# Altium PCB 主板-霍尔BC接地.PcbDoc (part 2 of 6)
Units mm, origin at the board's own origin, x right, y up, seen from the top; angles counter-clockwise.
Board outline 97.69 x 103.45 mm, 2 copper layers (Top Layer, Bottom Layer); 83 components, 83 nets, 266 pads, 295 vias.
Unrouted connection lines stored in the file: 11.
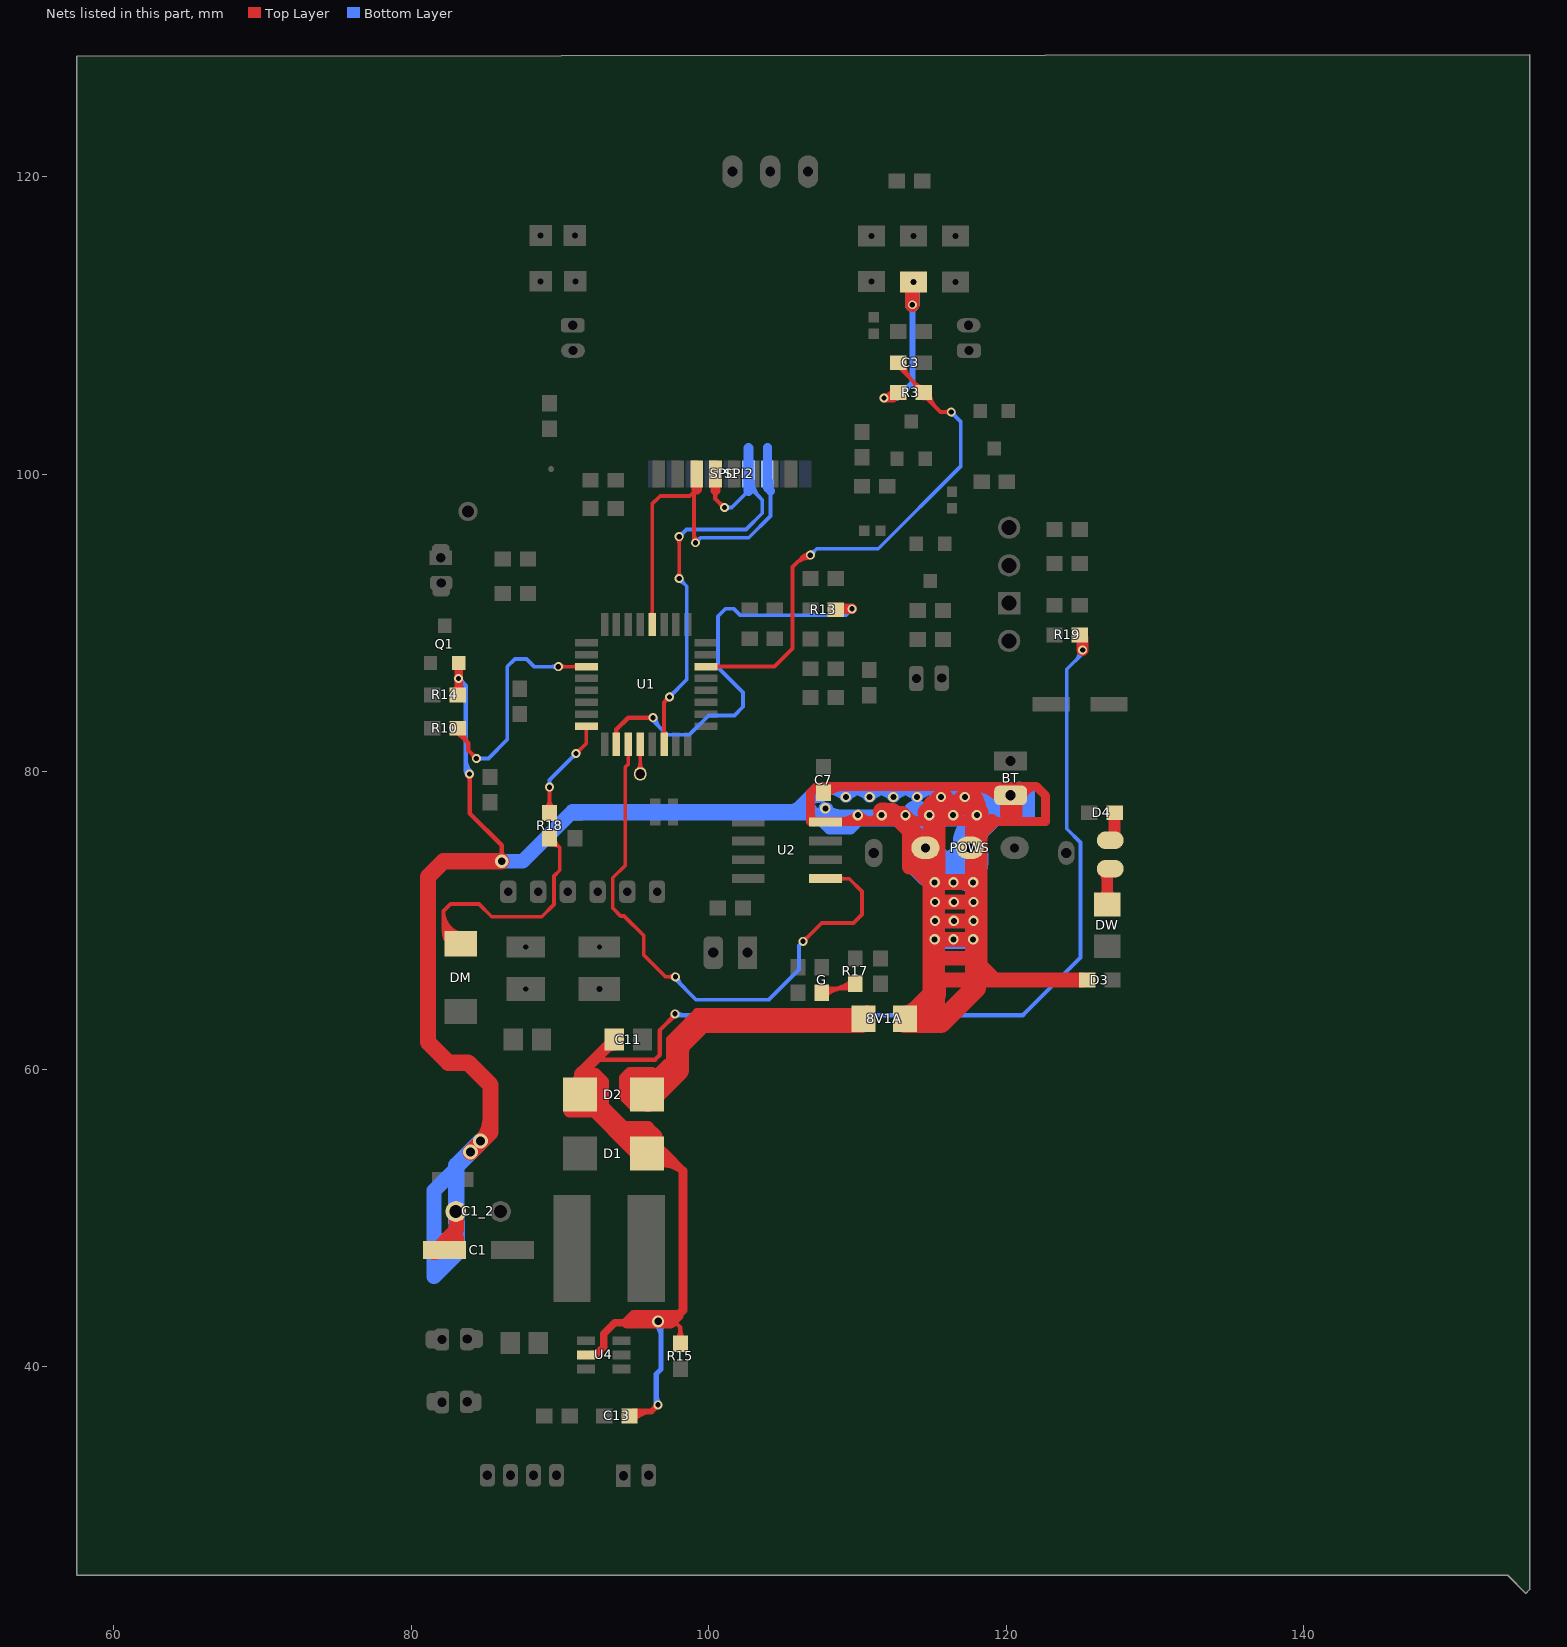
[diagram p2: the nets of this part, all layers, seen from the top]

## Via types
v1: diameter 0.6, hole 0.35, Top Layer to Bottom Layer, 117 vias
v2: diameter 0.7, hole 0.4, Top Layer to Bottom Layer, 104 vias
v3: diameter 0.8, hole 0.5, Top Layer to Bottom Layer, tented both sides, 32 vias
v4: diameter 0.8, hole 0.5, Top Layer to Bottom Layer, 15 vias
v5: diameter 1, hole 0.6, Top Layer to Bottom Layer, tented both sides, 5 vias
v6: diameter 1, hole 0.75, Top Layer to Bottom Layer, tented both sides, 5 vias
v7: diameter 3.4, hole 2.9, Top Layer to Bottom Layer, 4 vias
v8: diameter 0.65, hole 0.4, Top Layer to Bottom Layer, tented both sides, 2 vias
v9: diameter 0.8, hole 0.35, Top Layer to Bottom Layer, 2 vias
v10: diameter 0.7, hole 0.35, Top Layer to Bottom Layer, 2 vias
v11: diameter 1.1, hole 0.68, Top Layer to Bottom Layer, 2 vias
v12: diameter 0.62, hole 0.4, Top Layer to Bottom Layer, 1 vias
v13: diameter 0.95, hole 0.5, Top Layer to Bottom Layer, 1 vias
v14: diameter 0.9, hole 0.5, Top Layer to Bottom Layer, tented both sides, 1 vias
v15: diameter 0.7, hole 0.4, Top Layer to Bottom Layer, tented bottom, 1 vias
v16: diameter 0.8, hole 0.5, Top Layer to Bottom Layer, tented bottom, 1 vias

## Nets (pads, with @x,y where several pads share a name; then routed paths per layer and width w, separated by ;. In a path a pad name is that pad's centre, name@x,y a point inside that pad or via, vN(x,y) a via of type N, cw(c..) or ccw(c..) an arc to the next point about the centre after c; other vN are vias at no path point) (continued)
BT: 8V1A.1 8V1A.2 BT.1 C1.2 C1_2.2 C7.2 D2.2 D3.1 POWS.2 POWS.3 Q1.2 R14.1 U2.4 | length 538.8
  Top Layer w0.3: v1@83.816,79.752 cw(c83.559,79.495) 83.922,79.495 cw(c84.284,79.495) v1@84.028,79.752 ; v1(83.922,79.858) 83.922,77.216 86.081,75.057 v14(86.081,73.99) ; v14@85.868,74.202 ccw(c85.356,74.714) 86.081,74.714 ccw(c86.805,74.714) v14@86.293,74.202
  Top Layer w0.5: 97.384,60.071 97.384,62.027 97.536,62.179 ; 97.587,59.233 97.587,59.782 ; 97.866,61.29 97.796,61.525 97.536,61.785 97.536,62.179 ; 98.273,61.849 98.273,62.916 ; 98.641,63.284 98.958,63.602 ; 100.416,63.144 100.873,63.602 98.958,63.602 ; 108.21,63.856 cw(c108.21,61.308) 8V1A.2@110.011,63.109 ; 109.417,63.856 cw(c109.417,62.515) 8V1A.2@110.365,63.463 ; 8V1A.2@110.668,64.072 110.452,63.856 99.212,63.856 98.958,63.602 ; 8V1A.1@113.656,63.806 cw(c113.979,64.024) 113.703,64.3 114.554,65.151 ; 8V1A.1@113.75,63.498 cw(c115.799,63.498) 114.35,64.947 ; 114.605,63.602 115.138,64.135 ; 97.536,62.179 98.273,62.916 ; 98.273,62.916 98.958,63.602 ; 8V1A.1@113.2,64.048 ccw(c113.2,64.655) 113.629,64.226 cw(c113.2,64.655) 8V1A.1@113.2,64.048
  Top Layer w0.6: R14.1@83.029,85.311 ccw(c82.628,85.712) 83.195,85.712 ; R14.1@83.195,84.988 Q1.2@83.195,87.32 ; 106.858,77.101 ccw(c107.528,77.101) U2.4@107.054,76.627 ; C7.2@107.864,78.509 cw(c109.098,77.275) 109.098,79.019 ; U2.4@108.869,76.657 ccw(c108.869,78.252) v2@109.997,77.124 ; v2@110.068,77.124 ccw(c111.196,78.252) 111.196,76.657 ; 110.469,76.657 ccw(c110.469,78.252) v2@111.597,77.124 ; v2@111.668,77.124 ccw(c112.796,78.252) 112.796,76.657 ; 112.069,76.657 ccw(c112.069,78.252) v2@113.197,77.124 ; v2@113.268,77.124 ccw(c114.396,78.252) 114.396,76.657 ; 113.669,76.657 ccw(c113.669,78.252) v2@114.797,77.124 ; v2@114.868,77.124 ccw(c115.996,78.252) 115.996,76.657 ; 115.269,76.657 ccw(c115.269,78.252) v2@116.397,77.124 ; v2@116.468,77.124 ccw(c117.596,78.252) 117.596,76.657 ; 116.869,76.657 ccw(c116.869,78.252) v2@117.997,77.124 ; 117.563,79.019 cw(c117.563,76.135) BT.1@119.602,78.175 ; v2@118.072,77.12 ccw(c119.024,77.869) 119.024,76.657 ; 119.011,79.019 cw(c119.011,77.583) BT.1@120.027,78.599 ; BT.1@119.361,78.837 cw(c119.606,78.764) BT.1@119.606,79.019 ; BT.1@119.936,78.665 cw(c120.411,78.523) BT.1@120.411,79.019 ; BT.1@120.51,78.494 cw(c121.216,78.283) BT.1@121.216,79.019 ; BT.1@121.085,78.322 cw(c122.022,78.042) 122.022,79.019 ; 119.024,76.657 122.657,76.657 122.657,78.384 122.022,79.019 ; 119.024,76.657 115.164,76.657 113.005,76.657 106.858,76.657 106.858,78.588 107.29,79.019 122.022,79.019
  Top Layer w0.8: D2.2@94.945,57.607 94.361,58.191 94.361,59.411 94.717,59.766 96.19,59.766
  Top Layer w1: C1.2@81.509,47.676 C1.2@81.61,47.676 ; C1.2@83.05,47.854 83.05,48.663 C1.2@82.232,47.845 81.678,47.845 83.05,49.217 C1_2.2@83.05,50.442 ; 113.487,73.59 cw(c114.55,73.59) POWS.3@114.408,74.644 ; 113.487,74.735 cw(c114.395,74.735) 114.273,75.635 ; 113.487,75.046 ccw(c114.393,75.046) 114.284,74.147 ; POWS.3@114.404,75.14 cw(c114.529,76.175) 113.487,76.175 113.487,73.939 v2@115.138,72.288 ; v2@114.859,72.517 115.672,72.517 ; v2@114.884,69.926 115.697,69.926 ; v2@114.884,71.196 115.697,71.196 ; v2@115.164,72.644 117.373,72.644 ; 115.282,66.158 115.44,66 124.395,66 ; 115.672,67.462 117.881,67.462 ; 115.672,68.732 v2(116.459,68.732) v2(117.78,68.732) v2@117.881,68.732 ; 115.672,72.568 v2(116.459,72.568) v2(117.78,72.568) v2@117.881,72.568 ; 115.697,69.977 v2(116.484,69.977) v2(117.805,69.977) v2@117.907,69.977 ; 115.697,71.247 v2(116.484,71.247) v2(117.805,71.247) v2@117.907,71.247 ; 117.373,72.593 v2@117.615,72.834 ; POWS.2@117.597,74.715 cw(c115.991,73.109) 118.262,73.109 ; v2@117.63,72.568 cw(c118.31,72.568) 117.829,73.049 ; POWS.2@117.7,75.131 ccw(c117.462,75.895) 118.262,75.895 ; v2@117.856,72.439 ccw(c117.433,73.152) 118.262,73.152 ; v2@117.886,68.626 ccw(c117.038,69.474) 118.237,69.474 ; v2@117.886,68.838 cw(c117.038,67.991) 118.237,67.991 ; v2@117.886,72.674 cw(c117.038,71.826) 118.237,71.826 ; v2@117.911,69.871 ccw(c117.125,70.657) 118.237,70.657 ; v2@117.911,70.083 cw(c117.125,69.297) 118.237,69.297 ; v2@117.911,71.141 ccw(c117.125,71.927) 118.237,71.927 ; v2@117.911,71.353 cw(c117.125,70.567) 118.237,70.567 ; POWS.2@118.015,74.958 cw(c118.943,75.214) 118.262,75.895 ; POWS.2@118.024,74.892 cw(c119.871,74.892) 118.565,76.198 ; 118.237,73.309 cw(c117.038,73.309) 117.886,72.462 ccw(c116.977,73.371) 118.262,73.371 ; 119.024,76.657 118.262,75.895 ; D3.1@125.15,66 124.395,66 ; v2@117.615,72.834 118.237,73.457 118.237,73.127 ; v2@117.615,72.834 117.945,72.834 118.237,73.127 ; 118.237,73.127 cw(c117.425,73.127) 117.86,72.441 ccw(c117.425,73.127) 118.237,73.127 ; 118.237,73.127 118.237,66.98 119.217,66 124.395,66 ; 118.237,73.127 118.262,73.152 ; 118.262,73.152 118.262,75.895
  Top Layer w1.1: v5(83.998,54.432) 85.327,55.761 85.327,58.945 83.82,60.452 82.499,60.452 81.128,61.824 81.128,72.949 82.169,73.99 v14@86.055,73.99 ; v5@84.694,55.133 ccw(c83.165,56.662) 85.327,56.662
  Top Layer w1.2: v2@111.633,77.339 cw(c111.633,75.673) 112.811,76.851 ; 112.166,77.292 112.37,77.292 113.005,76.657 POWS.3@114.174,75.488 ; 112.533,77.129 ccw(c113.233,77.828) v2@113.233,76.839 ; v2@112.983,77.089 ccw(c113.972,77.089) 113.272,76.389 ; 113.838,75.824 cw(c112.906,74.892) POWS.3@114.224,74.892 ; v2@114.656,77.266 cw(c115.762,76.16) 115.762,77.724 ; v2@115.444,78.131 ccw(c116.428,79.115) 116.428,77.724 ; 115.503,77.724 cw(c115.503,76.16) v2@116.609,77.266 ; v2@115.859,78.232 cw(c115.164,78.454) 115.164,77.724 117.932,77.724 cw(c117.932,78.898) v2@117.029,78.149 ; v2@116.256,77.266 cw(c117.362,76.16) 117.362,77.724 ; 116.414,77.724 ccw(c116.414,79.115) v2@117.398,78.131 ; 117.103,77.724 cw(c117.103,76.16) v2@118.209,77.266
  Top Layer w1.4: D2.2@95.85,58.166 D2.2@95.91,58.166 ; D2.2@95.85,58.75 ccw(c95.85,61.041) 97.47,59.421 ; D2.2@95.91,57.836 D2.2@95.91,58.166 ; D2.2@96.3,58.3 cw(c97.96,58.3) 96.786,59.474 ; 97.384,60.071 95.91,58.598 D2.2@95.91,58.166 ; 97.866,61.29 98.044,61.468 ; 97.993,61.087 97.993,59.944 96.063,58.014 D2.2@95.91,58.166 ; 98.273,61.849 99.568,63.144 100.416,63.144 8V1A.2@110.312,63.144 ; 8V1A.1@113.2,63.598 ccw(c113.2,64.652) 8V1A.1@113.945,63.907 ; 114.097,64.059 113.182,63.144 115.621,63.144 117.932,65.456 117.932,77.724 ; 115.24,65.024 115.24,65.634 ; v2@117.468,78.556 cw(c116.349,77.436) 117.932,77.436 ccw(c116.349,77.436) v2@117.468,78.556
  Top Layer w1.5: 115.138,64.135 v2@115.138,72.288 ; v2@115.164,72.593 115.164,72.644 115.164,76.657 115.164,77.724 ; 115.164,73.951 ccw(c113.833,73.951) 114.774,74.892 ccw(c113.833,75.832) 115.164,75.832 ; 120.345,77.216 120.345,77.572
  Bottom Layer w0.3: v1@83.185,86.134 cw(c83.185,85.772) 83.441,86.028 cw(c83.697,86.284) v1@83.335,86.284 ; v1(83.185,86.284) 83.668,85.801 83.668,80.112 v1(83.922,79.858) ; 83.668,80.109 ccw(c84.173,80.109) v1@83.816,79.752 ; 83.668,80.833 ccw(c84.897,80.833) v1@84.028,79.964
  Bottom Layer w0.8: 105.693,77.27 105.896,77.473 107.34,78.918 117.132,78.918 ; 106.161,77.739 cw(c107.595,76.305) 107.595,78.333 ; 106.829,77.473 108.128,76.175 109.525,76.175 110.058,76.708 ; v2@107.799,77.555 ccw(c108.693,77.4) 108.052,76.759 ; v2@107.813,77.511 ccw(c108.857,78.554) 108.857,77.079 ; 107.87,78.918 cw(c107.87,76.957) v2@109.256,78.344 ; v2@109.186,78.344 cw(c110.572,76.957) 110.572,78.918 ; 109.233,76.708 ccw(c109.233,77.888) v2@110.068,77.054 ; 109.47,78.918 cw(c109.47,76.957) v2@110.856,78.344 ; 109.83,76.48 ccw(c109.222,77.089) v2@110.083,77.089 ; v2@109.997,77.054 ccw(c110.832,77.888) 110.832,76.708 ; v2@110.338,76.987 110.058,76.708 ; v2@110.786,78.344 cw(c112.172,76.957) 112.172,78.918 ; 110.833,76.708 ccw(c110.833,77.888) v2@111.668,77.054 ; 111.07,78.918 cw(c111.07,76.957) v2@112.456,78.344 ; v2@111.597,77.054 ccw(c112.432,77.888) 112.432,76.708 ; v2@112.386,78.344 cw(c113.772,76.957) 113.772,78.918 ; 112.433,76.708 ccw(c112.433,77.888) v2@113.268,77.054 ; 112.67,78.918 cw(c112.67,76.957) v2@114.056,78.344 ; v2@113.196,77.055 ccw(c113.995,77.802) 113.995,76.708 ; v2@113.986,78.344 cw(c115.372,76.957) 115.372,78.918 ; 114.033,76.708 ccw(c114.033,77.888) v2@114.868,77.054 ; 114.27,78.918 cw(c114.27,76.957) v2@115.656,78.344 ; v2@114.797,77.054 ccw(c115.632,77.888) 115.632,76.708 ; v2@115.586,78.344 cw(c116.972,76.957) 116.972,78.918 ; 115.633,76.708 ccw(c115.633,77.888) v2@116.468,77.054 ; 115.87,78.918 cw(c115.87,76.957) v2@117.256,78.344 ; v2@116.397,77.054 ccw(c117.232,77.888) 117.232,76.708 ; v2@117.186,78.344 cw(c118.572,76.957) 118.572,78.918 ; v2@117.221,78.358 cw(c117.221,77.222) 118.025,78.025 ; 117.233,76.708 ccw(c117.233,77.888) v2@118.068,77.054 ; v2@117.268,78.291 ccw(c116.713,78.499) 117.132,78.918 ; 117.461,78.589 cw(c115.962,77.089) v2@118.083,77.089 ; v2@117.983,77.082 ccw(c118.415,77.144) 118.415,76.708 ; v2@117.986,77.072 ccw(c118.436,77.233) 118.436,76.755 ; v2@117.997,77.054 ccw(c118.719,77.775) 118.719,76.755 ; 118.049,78.918 cw(c118.049,76.621) BT.1@119.673,78.245 ; v2@118.056,77.045 ccw(c117.75,77.635) 118.415,77.635 ; v2@118.055,77.134 cw(c117.76,76.549) 118.415,76.549 ; v2@118.057,77.133 cw(c117.742,76.567) 118.389,76.567 ; v2@118.058,77.132 cw(c117.709,76.548) 118.389,76.548 ; 118.389,76.683 118.389,76.708 ; BT.1@120.683,78.181 cw(c120.369,77.041) 121.552,77.041 ; BT.1@120.896,78.952 cw(c120.659,78.091) 121.552,78.091 ; BT.1@120.999,78.404 cw(c121.552,78.364) 121.552,78.918 ; 121.219,77.079 120.828,77.079 119.771,77.079 118.785,77.079 118.415,77.079 ; 108.052,76.759 107.732,77.079 113.995,77.079 118.389,77.079 118.415,77.079 ; 108.052,76.759 108.102,76.708 110.058,76.708 ; 110.058,76.708 113.995,76.708 ; 113.995,76.708 118.389,76.708 ; 117.132,78.918 118.415,77.635 ; 117.132,78.918 121.552,78.918 ; 118.389,76.708 cw(c118.389,77.116) 117.983,77.085 ccw(c118.389,77.116) 118.389,76.708 ; 118.389,76.708 118.415,76.708 ; 118.389,76.708 118.415,76.733 ; 118.415,76.708 118.415,76.733 ; 118.415,76.733 118.415,77.079 ; 118.415,76.733 118.436,76.755 ; 118.415,77.079 118.415,77.635 ; 118.436,76.755 118.462,76.755 ; 118.462,76.755 cw(c118.462,77.271) 117.987,77.07 ccw(c118.462,77.271) 118.462,76.755 ; 118.462,76.755 120.735,76.755 120.752,76.771 121.026,76.771 121.552,77.297 121.552,78.918 ; v2@118.04,77.139 cw(c117.979,76.707) 118.415,76.707 ccw(c117.979,76.707) v2@118.04,77.139 ; v2@118.054,77.134 cw(c117.789,76.567) 118.415,76.567 ccw(c117.789,76.567) v2@118.054,77.134
  Bottom Layer w0.9: 90.703,77.191 107.112,77.191 ; 94.209,77.343 94.267,77.401 105.824,77.401 105.896,77.473 106.829,77.473 ; 107.544,76.759 108.052,76.759 108.636,76.759 ; 107.732,77.079 107.224,77.079 ccw(c107.224,77.893) v2@107.936,77.498
  Bottom Layer w1: 82.017,47.93 82.017,47.549 83.033,47.549 ; 82.067,48.484 ccw(c82.871,48.484) 82.303,47.916 ; 82.855,53.162 81.534,51.841 81.534,46.05 83.05,47.566 83.05,48.336 ; v14(86.081,73.99) 87.503,73.99 90.703,77.191 ; 90.856,77.343 94.209,77.343 ; POWS.3@114.173,74.443 ccw(c115.684,75.571) 115.684,73.685 ; v2@114.935,68.758 114.935,73.152 ; v2@114.935,68.961 115.318,68.578 118.212,68.578 118.212,76.505 ; 114.935,68.983 ccw(c115.44,68.983) v2@115.083,68.626 ; 114.935,69.665 cw(c115.527,69.665) v2@115.108,70.083 ; 114.935,70.289 ccw(c115.527,70.289) v2@115.108,69.871 ; 114.935,70.935 cw(c115.527,70.935) v2@115.108,71.353 ; 114.935,71.559 ccw(c115.527,71.559) v2@115.108,71.141 ; 114.935,72.317 cw(c115.44,72.317) 115.083,72.674 cw(c115.869,71.887) 115.869,73 ; 114.935,72.819 ccw(c115.44,72.819) v2@115.083,72.462 ; 114.935,73 117.348,73 cw(c117.348,72.378) v2@117.917,72.628 ; POWS.3@114.974,75.041 ccw(c117.678,77.059) 117.678,73.685 114.376,73.685 ccw(c114.376,77.249) POWS.2@117.177,75.046 ; 115.779,73 cw(c115.779,71.887) v2@116.565,72.674 ; v2@116.353,72.674 cw(c117.139,71.887) 117.139,73 ; 116.435,73.685 ccw(c116.435,75.63) POWS.2@117.964,74.428 ; 117.099,73 cw(c117.099,71.887) 117.886,72.674 cw(c117.099,71.887) 118.212,71.887 ; POWS.2@117.597,74.715 cw(c116.114,73.232) 118.212,73.232 ; POWS.2@117.601,75.072 ccw(c116.226,76.505) 118.212,76.505 ; v2@117.886,68.626 ccw(c117.099,69.413) 118.212,69.413 ; v2@117.886,72.462 ccw(c117.099,73.248) 118.212,73.248 ; v2@117.911,69.871 ccw(c117.186,70.596) 118.212,70.596 ; v2@117.911,70.083 cw(c117.186,69.358) 118.212,69.358 ; v2@117.911,71.141 ccw(c117.186,71.866) 118.212,71.866 ; v2@117.911,71.353 cw(c117.186,70.628) 118.212,70.628 ; v2@118.139,77.195 cw(c117.533,76.59) 118.389,76.59 ; 118.389,76.683 118.212,76.505 ; 118.389,76.708 118.389,77.079 118.389,77.14 ; v2@118.107,77.219 cw(c117.828,76.732) 118.389,76.732 ccw(c117.828,76.732) v2@118.107,77.219
  Bottom Layer w1.1: 83.033,49.727 83.033,53.467 ; 83.05,47.898 83.05,49.727 ; v5@84.506,54.94 83.033,53.467 ; v5(84.658,55.169) 83.033,53.543 83.033,53.467
  Bottom Layer w1.3: 118.608,78.537 118.461,78.389 ; 119.771,77.079 119.278,77.572 118.461,78.389 ; BT.1@119.85,78.422 ccw(c119.172,77.678) 118.461,78.389 ; 120.828,77.079 120.828,77.47
  Bottom Layer w2: 113.995,77.114 113.995,77.079 113.995,76.708 113.995,74.092 114.935,73.152 cw(c116.155,74.372) POWS.3@114.54,74.98 ; POWS.2@117.524,74.892 cw(c119.758,74.892) 118.178,76.472 ; POWS.2@117.556,74.77 cw(c118.47,75.282) 117.729,76.022 ; POWS.2@117.587,75.023 cw(c116.185,74.163) 117.348,73 117.729,73.381 117.729,76.022 ; 118.212,76.505 117.729,76.022 ; 118.389,76.683 118.415,76.708 118.462,76.755 118.785,77.079 119.278,77.572 BT.1@119.99,78.283
  other v2: 115.189,68.732 115.214,69.977 115.214,71.247 115.189,72.568 110.033,77.089 111.633,77.089 113.233,77.089 114.833,77.089 116.433,77.089 118.033,77.089 107.848,77.546 109.221,78.308 110.821,78.308 112.421,78.308 114.021,78.308 115.621,78.308 117.221,78.308
BTJC: 
C-84: C11.1 C13.1 D1.2 D2.1 R15.1 R19.1 U4.5 | length 143.4
  Top Layer w0.3: D2.1@91.35,58.887 91.599,59.136 91.77,58.965 91.77,59.688 ; D2.1@92.053,59.011 cw(c92.721,59.688) 91.77,59.688 ; v4@96.773,42.876 cw(c97.506,42.143) 97.506,43.18 ; v4@96.835,42.981 cw(c97.104,42.899) 97.104,43.18 97.561,43.18 ; 97.429,63.342 ccw(c97.043,63.729) v1@97.589,63.729 ; v1@97.79,63.703 96.723,62.636 96.723,60.985 96.393,60.655 92.317,60.655 92.202,60.655 91.77,60.223 91.77,60.108 91.77,59.688 ; R15.1@97.853,41.848 ccw(c97.255,42.445) 98.1,42.445 ccw(c98.945,42.445) R15.1@98.348,41.848 ; R15.1@98.1,41.55 98.1,42.641 97.561,43.18 ; 97.134,42.887 cw(c97.561,42.722) 97.561,43.18 ; 97.134,42.887 cw(c97.561,42.722) 97.561,43.18 ; 97.134,42.887 cw(c97.561,42.722) 97.561,43.18
  Top Layer w0.4: C13.1@94.658,36.77 cw(c95.205,36.235) C13.1@95.205,37 ; C13.1@94.68,36.8 94.88,37 96.157,37 ; C13.1@94.944,36.49 cw(c96.157,35.304) 96.157,37 ; v1(96.596,37.44) 96.157,37
  Top Layer w0.5: D2.1@91.35,58.166 D2.1@91.77,58.166 ; U4.5@91.75,40.8 92.413,40.8 92.939,41.326 92.939,42.215 93.685,42.961 94.513,42.961 ; U4.5@92.055,40.845 ccw(c92.055,41.818) 92.743,41.13
  Top Layer w0.6: D1.2@95.656,54.28 97.155,54.28 ; D1.2@95.709,54.65 cw(c96.189,53.559) 97.032,54.402 ; D1.2@95.951,54.101 cw(c96.569,52.698) 97.652,53.782 ; D1.2@96.193,53.552 cw(c96.948,51.837) 98.273,53.162 ; D1.2@96.607,53.944 cw(c97.155,53.665) 97.155,54.28 ; D1.2@96.645,54.632 ccw(c97.155,54.826) 97.155,54.28 ; 97.428,42.961 98.273,43.805 98.273,53.162 ; 97.155,54.28 98.273,53.162
  Top Layer w0.8: D2.1@90.653,57.175 92.685,57.175 ; D2.1@90.939,58.927 ccw(c90.441,59.688) 91.35,59.688 ; D2.1@91.35,58.166 91.35,58.887 91.35,59.688 ; D2.1@91.761,58.927 cw(c92.259,59.688) 91.35,59.688 ; 92.888,57.15 92.888,59.182 92.382,59.688 91.77,59.688 91.35,59.688 ; C11.1@93.073,61.411 cw(c93.65,60.834) C11.1@93.65,61.65 ; C11.1@93.462,62 C11.1@93.662,62 ; C11.1@93.75,62 C11.1@93.662,62 ; 93.955,56.109 95.91,56.109 96.495,55.524 95.275,55.524 ; 95.688,43.429 cw(c95.688,42.145) v4(96.596,43.053) cw(c97.504,42.145) 97.504,43.429 ; v4@96.749,43.155 96.749,43.129 96.901,42.977 97.444,42.977 97.896,43.429 94.982,43.429 94.513,42.961 97.428,42.961 ; R19.1@124.929,89.129 cw(c124.407,88.607) 125.146,88.607 ; v1(125.146,88.189) R19.1@125.146,89 ; 91.35,59.688 91.77,60.108 92.317,60.655 C11.1@93.662,62
  Top Layer w1.5: D2.1@91.35,57.9 cw(c91.35,56.243) 92.521,57.415 ; D2.1@91.77,58.166 D1.2@95.656,54.28 ; D1.2@94.751,55.186 ccw(c95.85,56.285) D1.2@95.85,54.73
  Bottom Layer w0.254: 121.202,63.721 124.993,67.513 124.993,75.257 124.079,76.171 124.079,86.893 v1@125.146,87.96 ; 124.689,87.503 ccw(c124.003,88.189) v1@124.973,88.189
  Bottom Layer w0.3: v1@97.79,63.721 97.882,63.629 121.11,63.629 121.202,63.721 ; v1@97.845,63.835 ccw(c98.341,64.33) 98.341,63.629
  Bottom Layer w0.35: v4@96.437,42.894 cw(c95.562,42.019) 96.799,42.019 ; 96.469,38.048 ccw(c97.205,38.048) v1@96.685,37.528 ; v1@96.622,37.49 96.469,37.643 96.469,39.497 96.799,39.827 96.799,42.85 v4@96.634,43.015
  other v1: 97.739,63.729
CE: SPI1.6 SPI2.6 U1.12 | length 28.7
  Top Layer w0.254: U1.12@96.113,90.514 ccw(c95.903,90.724) 96.2,90.724 ccw(c96.497,90.724) U1.12@96.287,90.514 ; U1.12@96.2,89.902 96.2,98.003 96.749,98.552 98.73,98.552 99.009,98.831 99.009,95.631 v1@99.238,95.402 ; 99.009,96.065 ccw(c99.774,96.065) v1@99.233,95.525
  Top Layer w0.7: 99.187,99.009 SPI1.6@99.187,100.032
  Bottom Layer w0.254: v1(99.111,95.402) 99.441,95.733 102.692,95.733 104.165,97.206 104.165,98.882 ; v1@99.111,95.575 ccw(c99.111,95.993) 99.406,95.698 ccw(c99.701,95.402) v1@99.284,95.402
  Bottom Layer w0.6: 103.95,101.803 103.95,99.098 104.165,98.882 cw(c104.547,99.264) SPI2.6@104.062,99.502
CKTS: pad.0@95.402,79.858 U1.28 | length 3.4
  Top Layer w0.254: pad.0@95.188,80.092 ccw(c94.677,80.603) 95.4,80.603 ; U1.28@95.313,81.241 cw(c95.103,81.031) 95.4,81.031 cw(c95.697,81.031) U1.28@95.487,81.241 ; pad.0@95.4,79.855 U1.28@95.4,81.599 ; 95.4,80.615 ccw(c96.14,80.615) pad.0@95.617,80.092
CMD2: 
CSN: SPI1.5 SPI2.5 U1.30 | length 38.4
  Top Layer w0.254: U1.30@96.913,82.464 ccw(c96.703,82.674) 97,82.674 ccw(c97.297,82.674) U1.30@97.087,82.464 ; U1.30@97,81.853 97,84.681 v1(97.358,85.039) ; v1@97.185,85.039 cw(c96.768,85.039) 97.063,84.744 cw(c97.358,84.449) v1@97.358,84.866 ; v1@97.896,93.112 ccw(c97.601,93.407) 98.019,93.407 ccw(c98.436,93.407) v1@98.141,93.112 ; v1@97.896,95.686 cw(c97.601,95.391) 98.019,95.391 cw(c98.436,95.391) v1@98.141,95.686 ; v1@98.019,92.939 v1(98.019,95.809)
  Top Layer w0.3: 100.457,98.933 100.457,98.349 v1@101.054,97.752 ; 100.767,98.039 ccw(c101.067,98.338) v1@101.067,97.915 ; 100.828,97.977 cw(c100.616,97.765) v1@100.917,97.765
  Top Layer w0.7: 100.457,98.933 SPI1.5@100.457,100.032
  Bottom Layer w0.254: v1(97.358,85.039) 98.527,86.208 98.527,92.481 v1(98.019,92.989) ; v1@97.358,85.212 ccw(c97.358,85.63) 97.654,85.335 ccw(c97.949,85.039) v1@97.531,85.039 ; v1@98.019,92.816 cw(c98.019,92.399) 98.314,92.694 cw(c98.609,92.989) v1@98.192,92.989 ; v1(98.019,95.809) 98.501,96.291 102.514,96.291 103.607,97.384 103.607,98.274 SPI2.5@102.68,99.2 ; v1@98.019,95.982 ccw(c98.019,96.399) 98.314,96.104 ccw(c98.609,95.809) v1@98.192,95.809 ; v1(101.067,97.765) 101.549,97.765 102.68,98.895 ; v1@101.189,97.642 cw(c101.484,97.347) 101.484,97.765 cw(c101.484,98.182) v1@101.189,97.887 ; SPI2.5@102.724,99.557 ccw(c103.691,99.557) 103.007,98.873 ; SPI2.5@102.978,99.557 ccw(c104.558,99.557) 103.441,98.439
  Bottom Layer w0.7: 102.68,98.895 102.68,101.752
DCJC: R13.2 U1.26 | length 31
  Top Layer w0.3: U1.26@93.8,81.853 93.8,82.853 94.59,83.642 v1(96.266,83.642) ; v1@96.16,83.536 ccw(c95.904,83.28) 95.904,83.642 ccw(c95.904,84.004) v1@96.16,83.748 ; R13.2@108.55,90.9 R13.2@108.607,90.957
  Top Layer w0.7: R13.2@108.607,90.957 v1(109.626,90.957) ; R13.2@108.706,90.794 cw(c109.101,90.399) 109.101,90.957
  Bottom Layer w0.254: v1(96.266,83.642) 96.266,83.439 97.206,82.499 98.704,82.499 100,83.795 101.727,83.795 102.311,84.379 102.311,85.326 100.619,87.018 100.619,90.459 101.117,90.957 101.702,90.957 102.138,90.521 109.19,90.521 v1(109.626,90.957) ; v1@96.439,83.642 ccw(c97.347,83.642) 96.705,83 ; v1@109.453,90.957 cw(c109.036,90.957) 109.331,90.662 cw(c109.626,90.367) v1@109.626,90.784
DM: R18.2 U1.24 | length 11.9
  Top Layer w0.254: R18.2@89.036,77.544 ccw(c88.4,78.18) 89.3,78.18 ccw(c90.2,78.18) R18.2@89.564,77.544 ; v1@89.178,78.846 cw(c88.882,78.551) 89.3,78.551 cw(c89.718,78.551) v1@89.422,78.846 ; R18.2@89.3,77.304 v1(89.3,78.969) ; v1(91.084,81.229) 91.775,81.92 U1.24@91.775,83.078 ; v1@91.084,81.402 ccw(c91.084,81.82) 91.38,81.525 ccw(c91.675,81.229) v1@91.257,81.229 ; U1.24@91.669,83.033 U1.24@92.075,83.033 ; U1.24@91.688,82.991 cw(c91.478,82.781) 91.775,82.781 cw(c92.072,82.781) U1.24@91.862,82.991 ; U1.24@91.804,83.202 U1.24@91.973,83.033
  Bottom Layer w0.254: v1@89.178,79.091 ccw(c88.882,79.386) 89.3,79.386 ccw(c89.718,79.386) v1@89.422,79.091 ; v1(89.3,78.969) 89.3,79.445 v1(91.084,81.229) ; v1@90.911,81.229 cw(c90.494,81.229) 90.789,80.934 cw(c91.084,80.639) v1@91.084,81.056
DMD: DM.2 R18.1 | length 28.5
  Top Layer w0.254: 82.169,69.274 ccw(c83.341,69.274) DM.2@83.006,68.151 ; 82.169,69.615 ccw(c83.443,69.615) DM.2@83.079,68.394 ; 82.169,69.956 ccw(c83.544,69.956) DM.2@83.151,68.638 ; 82.169,70.297 ccw(c83.646,70.297) DM.2@83.224,68.881 ; DM.2@82.387,68.599 ccw(c81.59,68.788) 82.169,69.367 ; DM.2@82.491,69.046 cw(c82.11,68.665) DM.2@82.634,68.54 ; DM.2@82.94,69.139 cw(c82.765,69.963) 82.169,69.367 ; DM.2@83.297,69.125 cw(c83.747,70.637) 82.169,70.637 ; DM.2@83.388,68.148 82.169,69.367 ; R18.1@89.3,75.604 89.992,74.912 ; R18.1@89.363,75.112 cw(c89.484,74.403) 89.992,74.912 ; R18.1@89.673,75.48 ccw(c90.274,75.48) 89.849,75.055 ; 82.169,69.367 82.169,70.637 ; 82.169,70.637 82.652,71.12 84.557,71.12 85.42,70.256 88.773,70.256 89.599,71.082 89.599,72.987 89.992,73.381 89.992,74.912
DMLED: 
DW: D4.1 pad.4@127,75.4 | length 2.3
  Top Layer w0.4: pad.4@126.6,75.209 pad.4@127.291,75.901
  Top Layer w0.8: pad.4@127.291,75.901 D4.1@127.291,77.25
DW+: DW.1 pad.4@127,73.482 | length 4.5
  Top Layer w0.8: DW.1@126.517,71.355 ccw(c125.834,72.038) 126.8,72.038 ccw(c127.766,72.038) DW.1@127.083,71.355 ; pad.4@126.559,73.341 cw(c125.976,72.758) 126.8,72.758 ; DW.1@126.8,71.148 pad.4@126.8,73.482
FI-R: U1.27 U2.1 | length 42.2
  Top Layer w0.254: U1.27@94.513,81.241 cw(c94.303,81.031) 94.6,81.031 cw(c94.897,81.031) U1.27@94.687,81.241 ; U1.27@94.6,81.853 94.6,80.528 94.386,80.315 94.386,73.711 93.548,72.873 93.548,70.841 94.082,70.307 94.317,70.307 95.631,68.994 95.631,67.691 97.104,66.218 v1(97.765,66.218) ; v1@97.642,66.095 ccw(c97.347,65.8) 97.347,66.218 ccw(c97.347,66.635) v1@97.642,66.34 ; v1@106.35,68.778 ccw(c106.35,69.257) 106.688,68.919 ; v1@106.362,68.593 107.606,69.837 109.733,69.837 110.312,70.416 110.312,71.958 109.453,72.817 U2.1@108.154,72.817 ; v1@106.523,68.605 cw(c106.879,68.605) 106.627,68.857 ; U2.1@108.776,72.695 cw(c109.072,72.399) 109.072,72.817 cw(c109.072,73.235) U2.1@108.776,72.939
  Bottom Layer w0.254: v1@97.663,66.37 97.663,66.167 99.162,64.668 104.021,64.668 106.07,66.718 106.07,68.326 v1(106.35,68.605) ; v1@97.938,66.218 ccw(c98.723,66.218) 98.168,65.662
FL: pad.0@113.78,112.932 R3.2 | length 15.3
  Top Layer w0.254: pad.0@113.65,112.822 113.538,112.822 113.538,112.932 pad.0@113.75,112.932
  Top Layer w0.6: R3.2@112.521,105.588 cw(c111.785,105.95) v1(111.785,105.131) ; R3.2@112.75,105.5 cw(c111.854,106.396) v1(111.785,105.131) ; R3.2@112.75,105.5 112.381,105.131 v1(111.785,105.131) ; pad.0@113.65,112.822 pad.0@113.69,112.862
  Top Layer w1: v1(113.69,111.404) pad.0@113.69,112.862 ; pad.0@113.69,112.233 cw(c114.479,112.233) pad.0@113.921,112.79
  Bottom Layer w0.4: v1(111.785,105.131) 112.674,105.131 113.69,106.147 v1(113.69,111.404)
  Bottom Layer w1: v1(113.69,111.404) pad.0@113.69,112.862 ; pad.0@113.69,112.233 cw(c114.479,112.233) pad.0@113.921,112.79
FL-U: C3.2 R3.1 U1.6 | length 45.3
  Top Layer w0.254: U1.6@99.825,87.077 104.426,87.077 105.639,88.29 105.639,93.777 106.426,94.564 ; U1.6@100.437,86.991 cw(c100.647,86.781) 100.647,87.077 cw(c100.647,87.374) U1.6@100.437,87.164 ; 105.843,93.982 cw(c106.832,92.992) v1@106.832,94.391 ; 106.277,94.415 cw(c106.832,93.86) v1@106.832,94.645 ; v1@106.708,94.444 ccw(c106.426,94.173) 106.426,94.564 ; v1@106.708,94.684 cw(c106.426,94.955) 106.426,94.564 ; v1(106.832,94.564) 106.426,94.564 ; C3.2@112.919,107.5 ccw(c113.956,107.5) 113.223,106.767 ; C3.2@112.984,107.315 112.674,107.315 R3.1@114.47,105.52 ; C3.2@113.173,107.5 ccw(c114.823,107.5) 113.656,106.333 ; 113.7,106.289 cw(c112.911,105.5) R3.1@114.027,105.5 ; 113.916,106.074 ccw(c114.4,106.558) R3.1@114.4,105.873 ; R3.1@114.45,105.105 R3.1@114.45,105.209 ; R3.1@114.5,105.127 cw(c114.5,104.743) R3.1@114.772,105.015 ; R3.1@114.579,105.207 115.595,104.191 v1(116.307,104.191) ; R3.1@114.619,105.5 ccw(c115.422,105.5) 114.854,104.932 ; R3.1@114.873,105.5 ccw(c116.29,105.5) 115.288,104.498 ; v1@116.184,104.068 ccw(c115.889,103.773) 115.889,104.191 ccw(c115.889,104.608) v1@116.184,104.313
  Bottom Layer w0.254: v1(106.832,94.564) 107.264,94.996 111.404,94.996 116.942,100.533 116.942,103.556 v1(116.307,104.191) ; v1@106.832,94.737 ccw(c106.832,95.155) 107.128,94.86 ccw(c107.423,94.564) v1@107.005,94.564 ; v1@116.307,104.018 cw(c116.307,103.6) 116.602,103.895 cw(c116.897,104.191) v1@116.48,104.191
FM: R10.2 U1.19 | length 20.4
  Top Layer w0.254: v1(89.891,87.071) 91.769,87.071 U1.19@91.775,87.077 ; v1@90.013,86.949 cw(c90.308,86.654) 90.308,87.071 cw(c90.308,87.489) v1@90.013,87.194 ; 90.938,87.071 ccw(c90.938,87.39) U1.19@91.163,87.164 ; 90.968,87.071 cw(c90.968,86.796) U1.19@91.163,86.991
  Top Layer w0.3: R10.2@82.968,82.792 83.845,81.915 ; R10.2@83.22,82.924 ccw(c83.905,82.833) 83.416,82.344 ; R10.2@83.517,82.885 ccw(c84.662,82.731) 83.845,81.915 ; v1@84.229,80.899 ccw(c83.867,80.899) 84.123,81.155 ccw(c84.379,81.411) v1@84.379,81.049 ; v1(84.379,80.899) 83.845,81.432 83.845,81.915
  Bottom Layer w0.254: v1(84.379,80.899) 85.192,80.899 86.462,82.169 86.462,87.071 86.97,87.579 87.757,87.579 88.265,87.071 v1(89.891,87.071) ; v1@84.501,80.777 cw(c84.796,80.481) 84.796,80.899 cw(c84.796,81.317) v1@84.501,81.021 ; v1@89.768,86.949 ccw(c89.473,86.654) 89.473,87.071 ccw(c89.473,87.489) v1@89.768,87.194
G-R: G.2 R17.2 | length 7
  Top Layer w0.254: G.2@107.684,65.116 cw(c108.444,64.356) 108.444,65.43 ; G.2@107.7,65.15 107.98,65.43 109.535,65.43 R17.2@109.855,65.75 ; G.2@107.864,64.936 cw(c109.057,63.743) 109.057,65.43 ; 108.304,65.43 ccw(c108.304,67.251) R17.2@109.591,65.964 ; 108.917,65.43 ccw(c108.917,66.638) R17.2@109.771,65.784